# Altium PCB sar20-afbr-s50-array-board.PcbDoc (part 1 of 2)
Units mm, origin at the board's own origin, x right, y up, seen from the top; angles counter-clockwise.
Board outline 56.81 x 49.75 mm, 4 copper layers (Top Layer, L2, L3, Bottom Layer), stack 1.588 mm thick; 83 components, 66 nets, 442 pads, 280 vias.
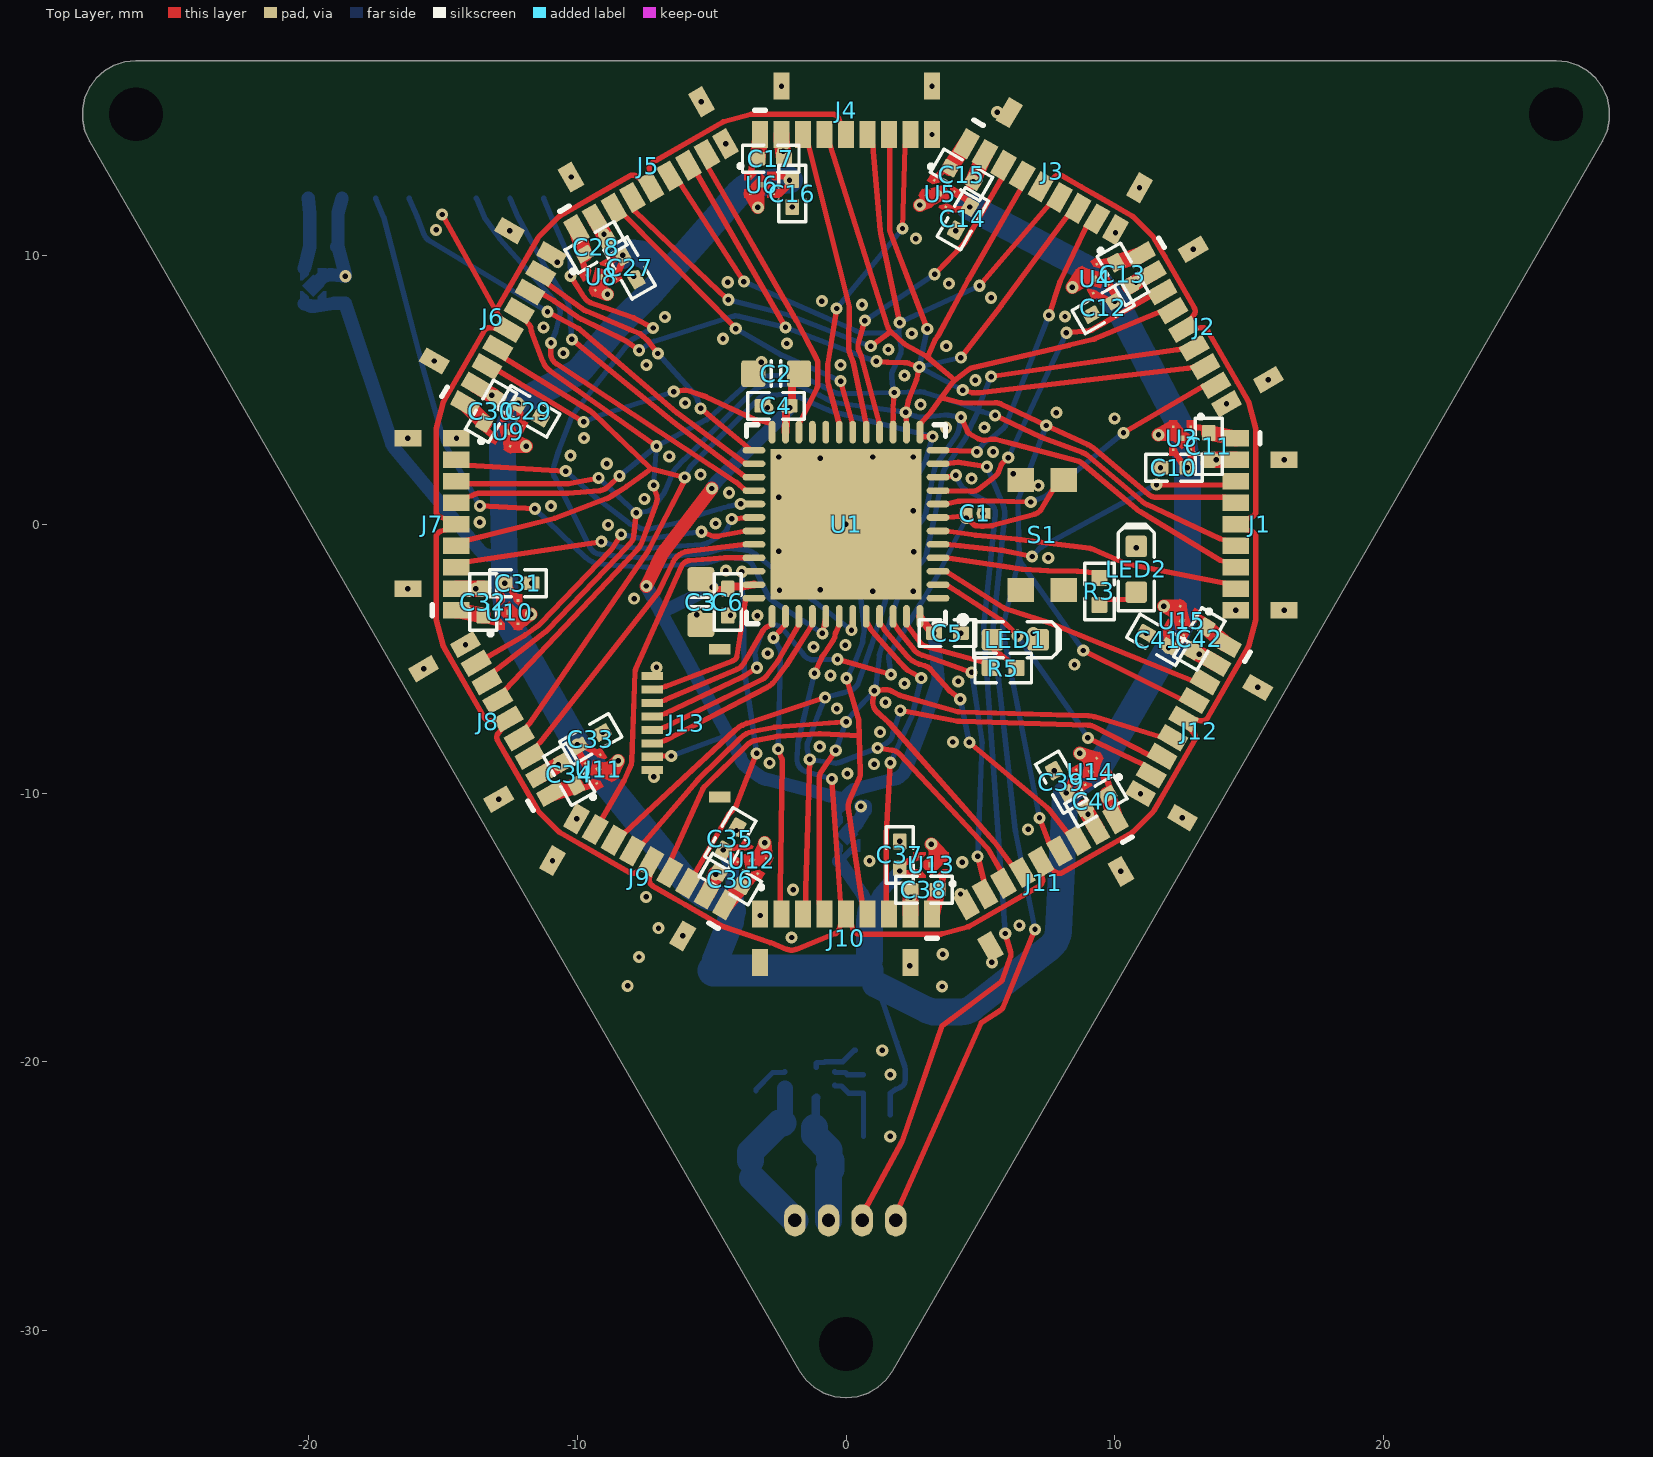
[diagram p0: Top Layer view]
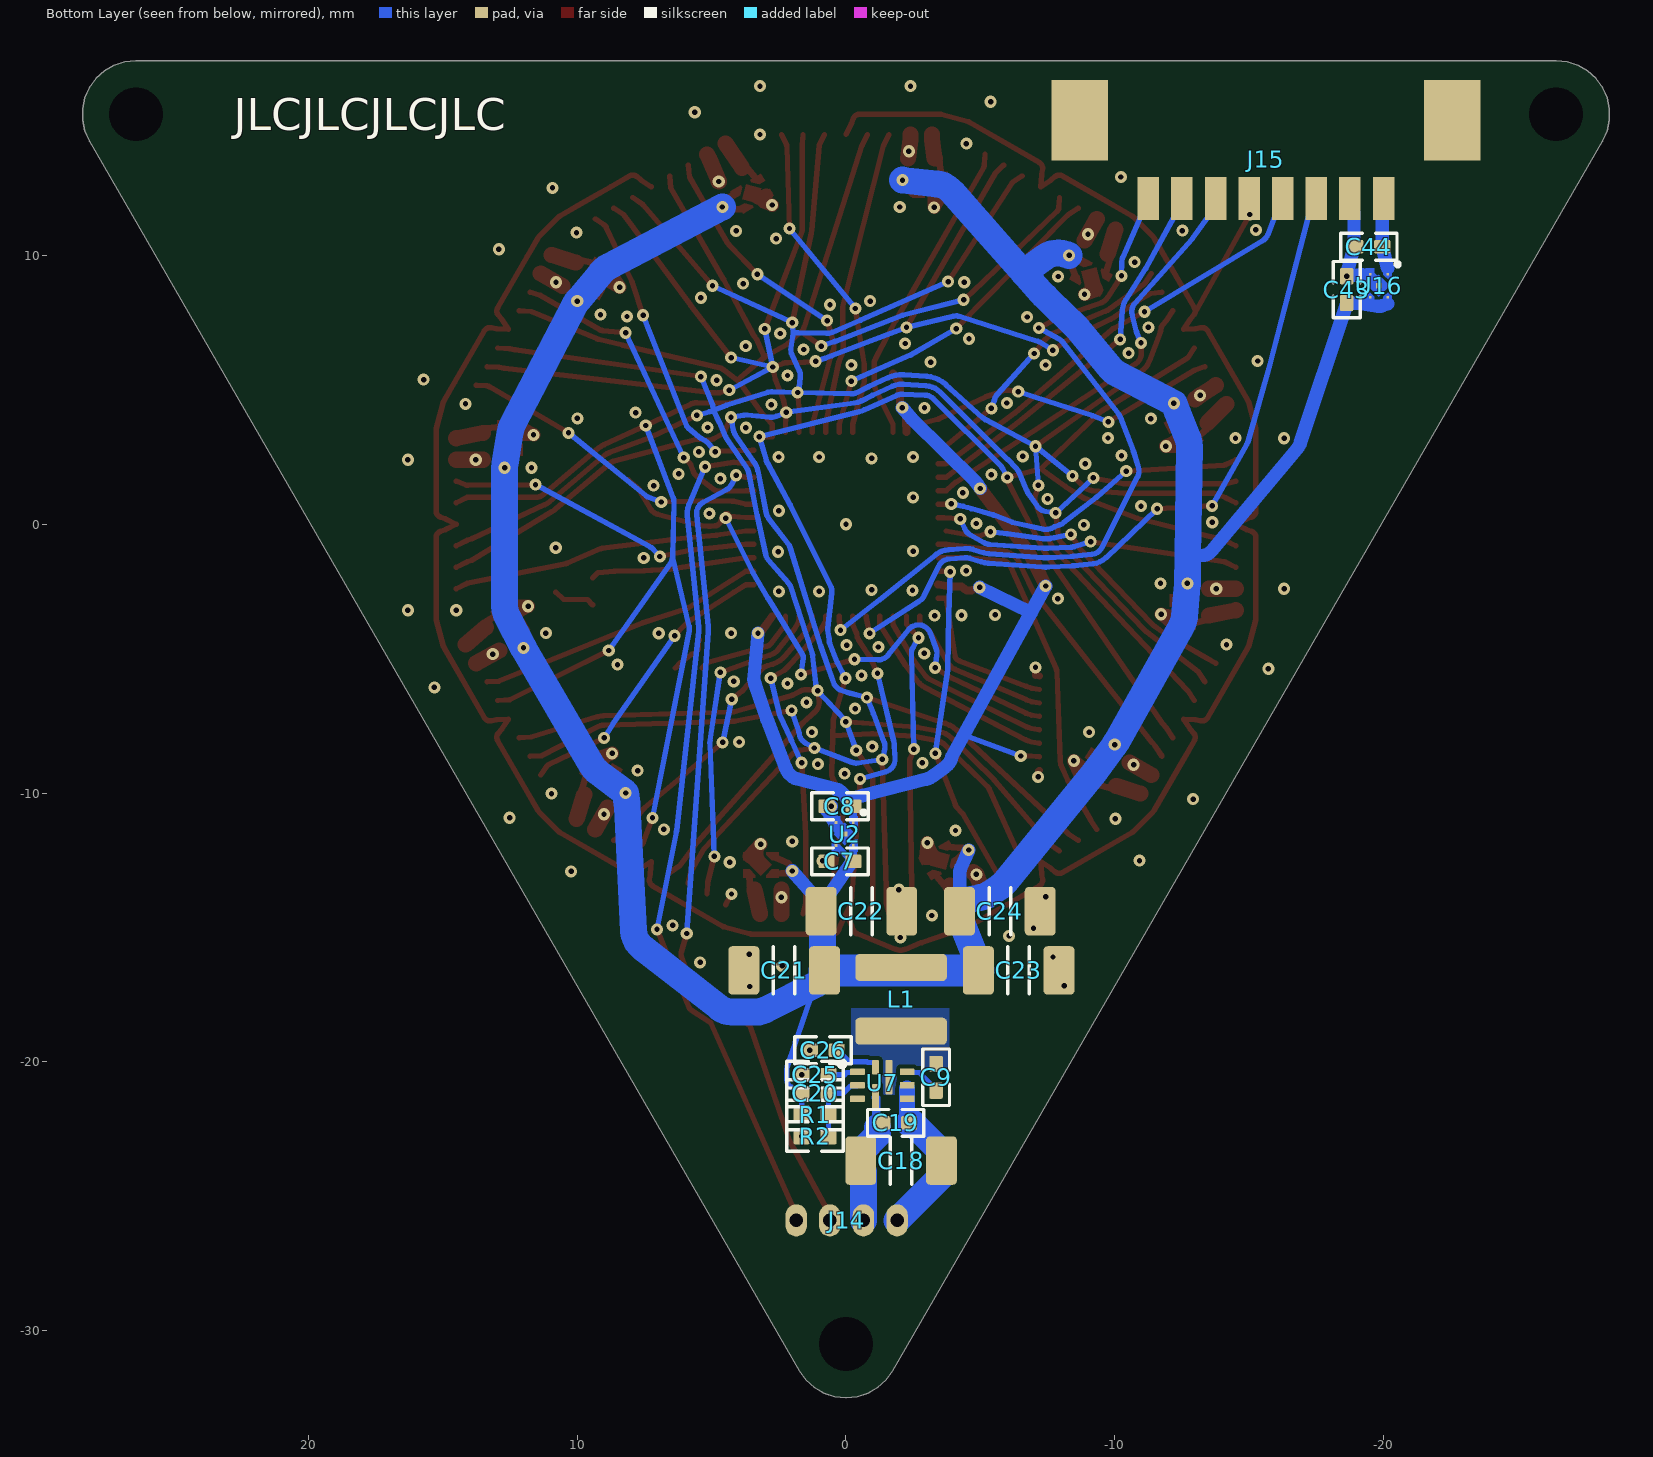
[diagram p1: Bottom Layer view, seen from below]
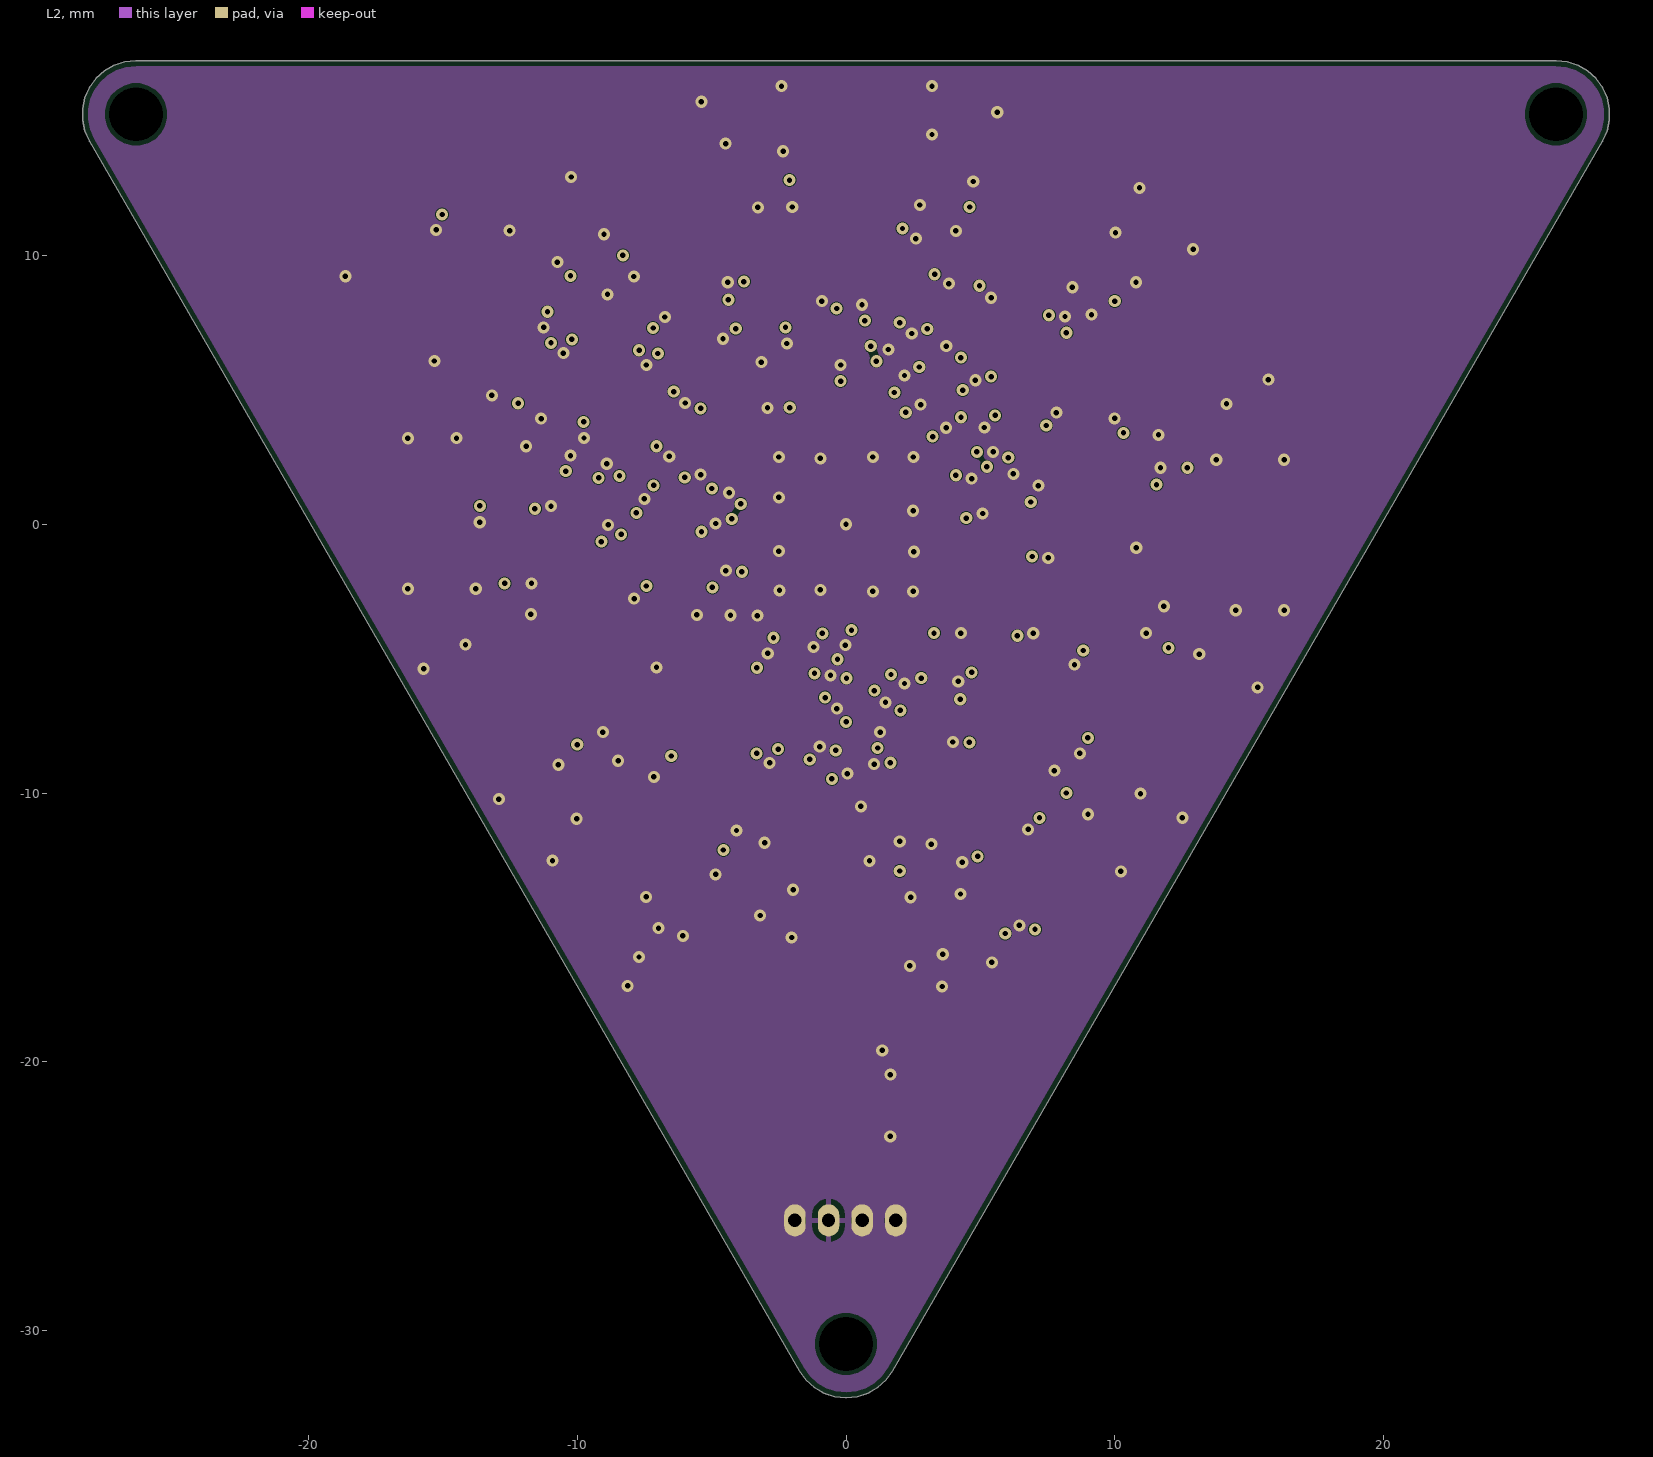
[diagram p2: L2]
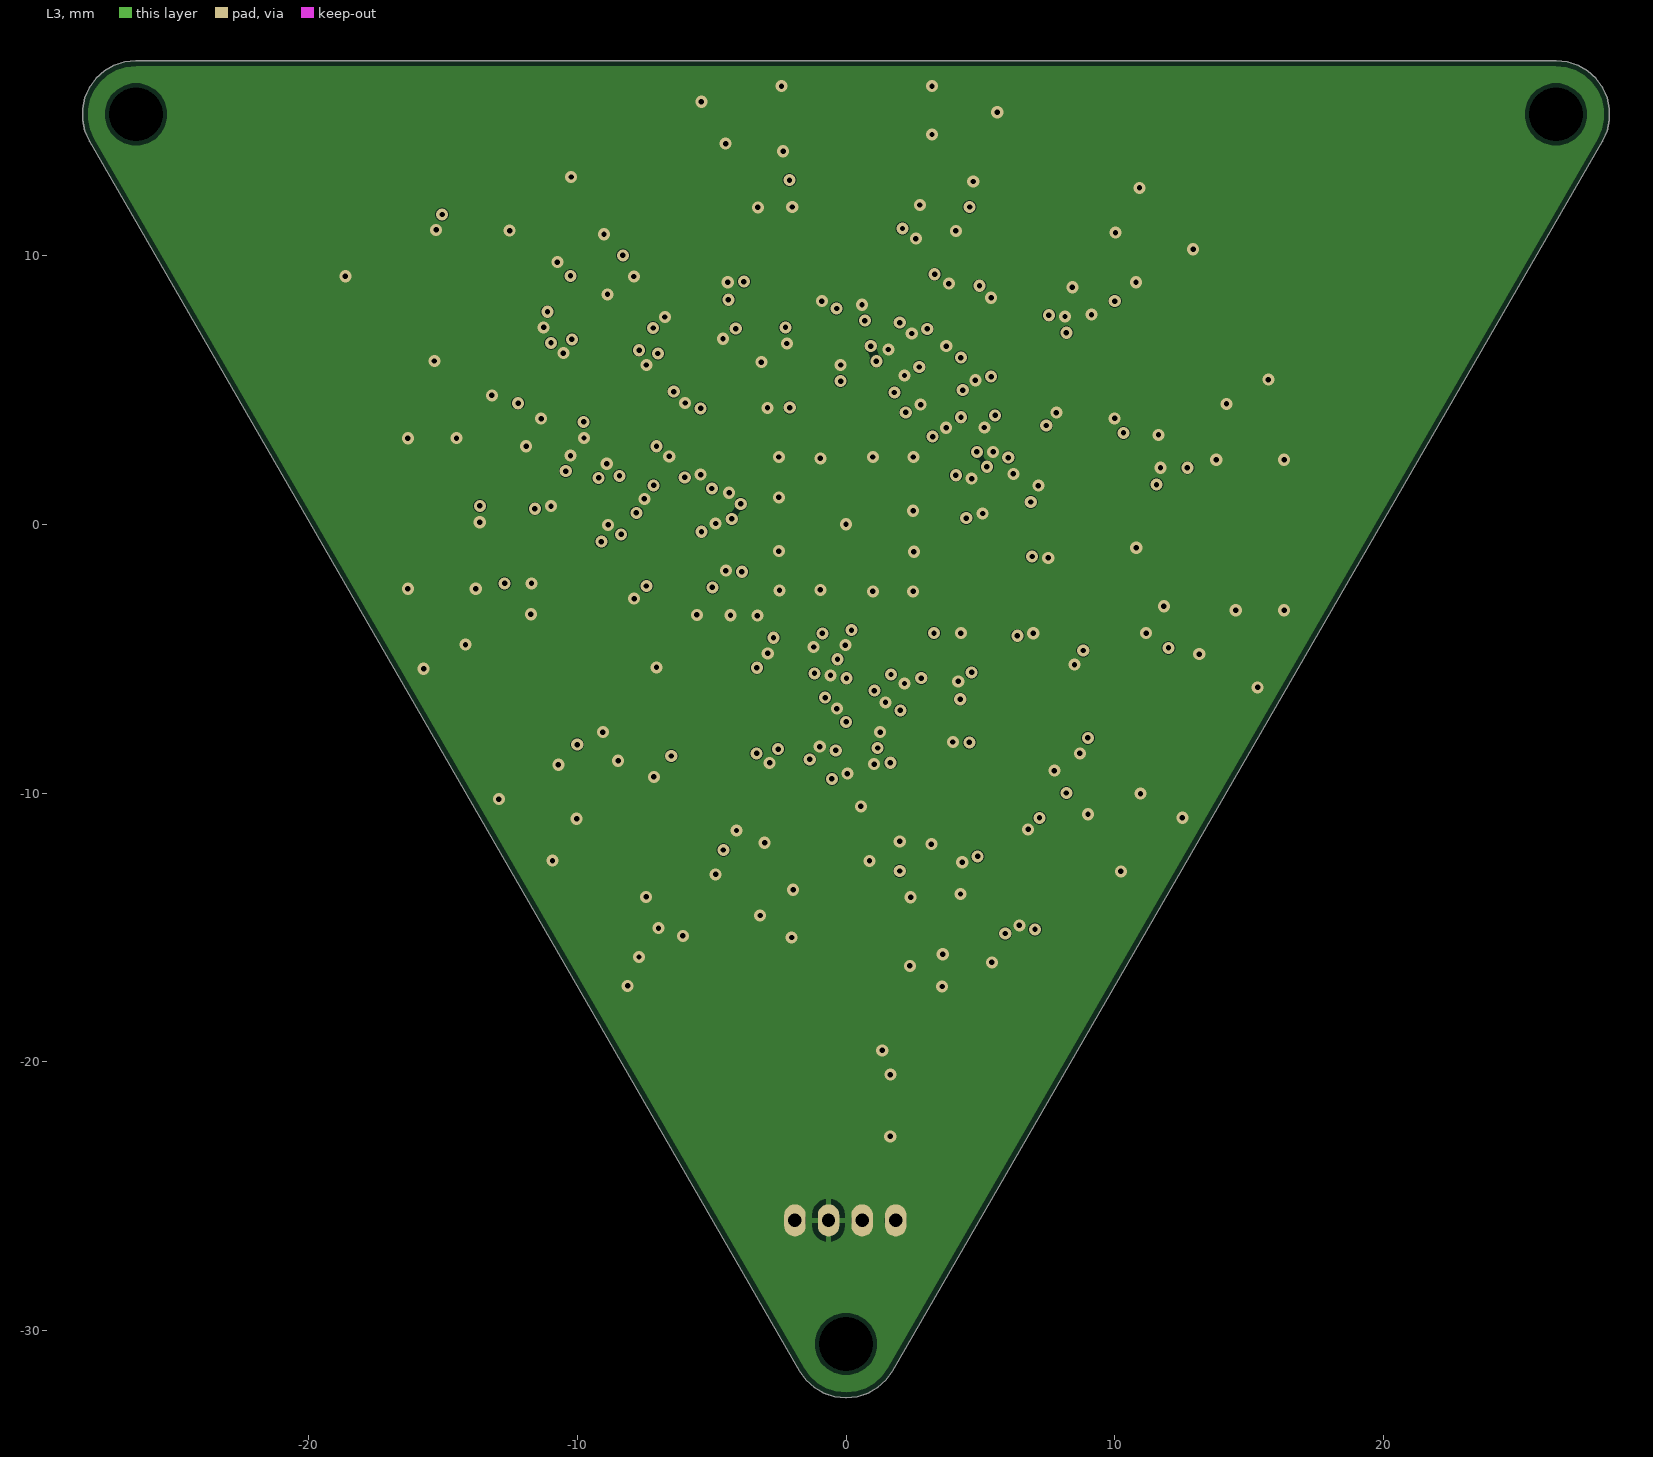
[diagram p3: L3]

## Layer stack, top to bottom
Top Solder: solder mask 0.0102, Solder Resist, Dk 3.5
Top Layer: signal copper 0.035
Dielectric 2: prepreg 0.2083, PP-022, Dk 4.5
L2: signal copper 0.018
Dielectric 1: core 1.065, Core-042, Dk 4.6
L3: signal copper 0.018
Dielectric 3: prepreg 0.2083, PP-022, Dk 4.5
Bottom Layer: signal copper 0.035
Bottom Solder: solder mask 0.0102, Solder Resist, Dk 3.5

## Board outline
-26.414,17.25 -26.83,17.206 -27.227,17.077 -27.589,16.868 -27.9,16.588 -28.146,16.25 -28.316,15.868 -28.403,15.459 -28.403,15.041 -28.316,14.632 -28.146,14.25 -1.732,-31.5 -1.486,-31.838 -1.176,-32.118 -0.813,-32.327 -0.416,-32.456 0,-32.5 0.416,-32.456 0.813,-32.327 1.176,-32.118 1.486,-31.838 1.732,-31.5 28.146,14.25 28.316,14.632 28.403,15.041 28.403,15.459 28.316,15.868 28.146,16.25 27.9,16.588 27.589,16.868 27.227,17.077 26.83,17.206 26.414,17.25

## Design rules (kind name [scope] priority, off if disabled: settings)
BoardOutlineClearance [All] p1: gap=0.2 ignorepadtopadclearanceinfootprint=FALSE except(0: Arc-SplitContinuation Track-SplitContinuation SMDPad-SplitContinuation THPad-SplitContinuation Via-SplitContinuation Fill-SplitContinuation Poly-SplitContinuation Region-SplitContinuation Text-SplitContinuation)
Clearance ClearanceComponentPads [HasFootprint('TI_X2SON_DQN0004A')] p1: gap=0.1 ignorepadtopadclearanceinfootprint=FALSE except(0: Arc-Hole Track-Hole SMDPad-Hole THPad-Hole Via-Hole Fill-Hole Poly-Hole Region-Hole Text-Hole)
Clearance [All] p2: gap=0.15 ignorepadtopadclearanceinfootprint=TRUE except(0: Arc-Hole Track-Hole SMDPad-Hole THPad-Hole Via-Hole Fill-Hole Poly-Hole Region-Hole Text-Hole)
ComponentClearance [All] p1: gap=0.1 collisioncheckmode=3 verticalgap=0.1 showdistances=FALSE
PolygonConnect PolygonConnectDirect [IsVia or InNet('NetC9_2')] p1: connectstyle=Direct reliefconductorwidth=0.2 reliefentries=4 polygonreliefangle="90 Angle" airgapwidth=0.2
PolygonConnect [All] p2: connectstyle=Relief reliefconductorwidth=0.2 reliefentries=4 polygonreliefangle="90 Angle" airgapwidth=0.2
RoomDefinition sar20-afbr-s50-array-board [InComponentClass('sar20-afbr-s50-array-board')] p1: confinementstyle=ConfineIn formatcopy=TRUE lockcomponents=FALSE outline -103.508,-80.857 111,-80.857 111,94 -103.508,94
RoutingVias [All] p1: holewidth=0.2 width=0.45 viastyle="Through Hole" minholewidth=0.2 minwidth=0.45 maxholewidth=3 maxwidth=5
SolderMaskExpansion SolderMaskExpansionVia [IsVia] p1: expansion=0.05 istentingtop=TRUE
SolderMaskExpansion [All] p2: expansion=0.05 istentingtop=FALSE
Width [All] p1: maxlimit=5 minlimit=0.2 preferedwidth=0.2
29 further rules are at their usual default settings.

## Components (designator, comment, footprint, x,y, rotation, side; value= is the part's Value field where it differs from the comment)
C1 "CAPC_100n_0201" CAPC0603X04N 4.8,0.4 r180 top value=100n
C2 "approved sub OK" CAPC1608X90N -2.6,5.6 r180 top value=4.7u
C3 "approved sub OK" CAPC1608X90N -5.4,-2.9 r270 top value=4.7u
C4 "100n" CAPC1005X55N -2.6,4.4 r0 top
C5 "100n" CAPC1005X55N 3.775,-4.05 r180 top
C6 "100n" CAPC1005X55N -4.4,-2.9 r90 top
C7 "1u" CAPC1005X55N 0.225,-12.545 r180 bottom
C8 "1u" CAPC1005X55N 0.225,-10.495 r180 bottom
C9 "100n" CAPC1005X55N -3.35,-20.575 r90 bottom
C10 "1u" CAPC1005X55N 12.2,2.1 r0 top
C11 "1u" CAPC1005X55N 13.5,2.9 r90 top
C12 "1u" CAPC1005X55N 9.567,8.05 r30 top
C13 "1u" CAPC1005X55N 10.3,9.3 r120 top
C14 "1u" CAPC1005X55N 4.35,11.367 r60 top
C15 "1u" CAPC1005X55N 4.3,13 r150 top
C16 "1u" CAPC1005X55N -2,12.3 r90 top
C17 "1u" CAPC1005X55N -2.8,13.6 r180 top
C18 "approved sub OK" CAPC3216X180N -2.05,-23.675 r0 bottom value=47u
C19 "100n" CAPC1005X55N -1.85,-22.275 r180 bottom
C20 "33p" CAPC1005X55N 1.15,-21.175 r0 bottom
C21 "approved sub OK" CAPC3216X180N 2.3,-16.6 r0 bottom value=47u
C22 "approved sub OK" CAPC3216X180N -0.575,-14.4 r180 bottom value=47u
C23 "approved sub OK" CAPC3216X180N -6.425,-16.6 r180 bottom value=47u
C24 "approved sub OK" CAPC3216X180N -5.725,-14.4 r180 bottom value=47u
C25 "1u" CAPC1005X55N 1.15,-20.475 r180 bottom
C26 "10n" CAPC1005X55N 0.85,-19.575 r180 bottom
C27 "1u" CAPC1005X55N -8.05,9.533 r120 top
C28 "1u" CAPC1005X55N -9.3,10.3 r210 top
C29 "1u" CAPC1005X55N -11.8,4.2 r150 top
C30 "1u" CAPC1005X55N -13.2,4.2 r240 top
C31 "1u" CAPC1005X55N -12.2,-2.2 r180 top
C32 "1u" CAPC1005X55N -13.5,-2.9 r270 top
C33 "1u" CAPC1005X55N -9.5,-8 r210 top
C34 "1u" CAPC1005X55N -10.3,-9.3 r300 top
C35 "1u" CAPC1005X55N -4.3,-11.7 r240 top
C36 "1u" CAPC1005X55N -4.3,-13.2 r330 top
C37 "1u" CAPC1005X55N 2,-12.3 r270 top
C38 "1u" CAPC1005X55N 2.9,-13.6 r0 top
C39 "1u" CAPC1005X55N 8,-9.6 r300 top
C40 "1u" CAPC1005X55N 9.3,-10.3 r30 top
C41 "1u" CAPC1005X55N 11.6,-4.3 r330 top
C42 "1u" CAPC1005X55N 13.15,-4.267 r60 top
C43 "1u" CAPC1005X55N -18.625,8.725 r270 bottom
C44 "1u" CAPC1005X55N -19.45,10.325 r180 bottom
J1 "AFBR-S50_PADS" AFBR-S50_PADS 15,0 r270 top locked
J2 "AFBR-S50_PADS" AFBR-S50_PADS 12.99,7.5 r300 top locked
J3 "AFBR-S50_PADS" AFBR-S50_PADS 7.5,12.99 r330 top locked
J4 "AFBR-S50_PADS" AFBR-S50_PADS 0,15 r0 top locked
J5 "AFBR-S50_PADS" AFBR-S50_PADS -7.5,12.99 r30 top locked
J6 "AFBR-S50_PADS" AFBR-S50_PADS -12.99,7.5 r60 top locked
J7 "AFBR-S50_PADS" AFBR-S50_PADS -15,0 r90 top locked
J8 "AFBR-S50_PADS" AFBR-S50_PADS -12.99,-7.5 r120 top locked
J9 "AFBR-S50_PADS" AFBR-S50_PADS -7.5,-12.99 r150 top locked
J10 "AFBR-S50_PADS" AFBR-S50_PADS 0,-15 r180 top locked
J11 "AFBR-S50_PADS" AFBR-S50_PADS 7.5,-12.99 r210 top locked
J12 "AFBR-S50_PADS" AFBR-S50_PADS 12.99,-7.5 r240 top locked
J13 "FPC" HIROSE-FH19C-8S-0.5SH -4.7,-7.4 r90 top
J14 "MOLEX_PICOBLADE_530470410" MOLEX_PICOBLADE_530470410 -1.9,-25.9 r0 bottom
J15 "MOLEX_PICOBLADE_532610871" MOLEX_PICOBLADE_532610871 -15.625,12.125 r0 bottom
L1 "XGL4030-332" XGL4030 -2.05,-17.675 r90 bottom
LED1 "White" LED-0603-WHITE 6.3,-4.3 r0 top
LED2 "White" LED-0603-WHITE 10.8,-1.675 r90 top
R1 "Thick Film" RESC1005X40N 1.15,-21.975 r0 bottom value=232k
R2 "Thick Film" RESC1005X40N 1.15,-22.775 r180 bottom value=30k
R3 "Thick Film" RESC1005X40N 9.425,-2.5 r270 top value=1k
R5 "Thick Film" RESC1005X40N 5.85,-5.35 r0 top value=1k
S1 "PUSHBUTTON" KMR421NGLFS 7.3,-0.4 r90 top
U1 "STM32G491CxU" QFN50P700X700X60_HS-49N 0,0 r180 top locked
U2 "TPS7A20_DQN" TI_X2SON_DQN0004A 0.05,-11.525 r270 bottom
U3 "TPS7A20_DQN" TI_X2SON_DQN0004A 12.5,3.2 r270 top
U4 "TPS7A20_DQN" TI_X2SON_DQN0004A 9.266,9.135 r300 top
U5 "TPS7A20_DQN" TI_X2SON_DQN0004A 3.5,12.3 r330 top
U6 "TPS7A20_DQN" TI_X2SON_DQN0004A -3.13,12.625 r0 top
U7 "TPS566238" TI_VQFN-HR_RQF0009A -1.35,-20.875 r180 bottom
U8 "TPS7A20_DQN" TI_X2SON_DQN0004A -9.11,9.204 r30 top
U9 "TPS7A20_DQN" TI_X2SON_DQN0004A -12.566,3.435 r60 top
U10 "TPS7A20_DQN" TI_X2SON_DQN0004A -12.525,-3.27 r90 top
U11 "TPS7A20_DQN" TI_X2SON_DQN0004A -9.204,-9.11 r120 top
U12 "TPS7A20_DQN" TI_X2SON_DQN0004A -3.5,-12.5 r150 top
U13 "TPS7A20_DQN" TI_X2SON_DQN0004A 3.17,-12.675 r180 top
U14 "TPS7A20_DQN" TI_X2SON_DQN0004A 9.11,-9.204 r210 top
U15 "TPS7A20_DQN" TI_X2SON_DQN0004A 12.496,-3.59 r240 top
U16 "TPS7A20_DQN" TI_X2SON_DQN0004A -19.825,8.87 r270 bottom

## Footprints (in the part's own frame and the unit in brackets; to place one, negate y for a bottom-side part, rotate by r counter-clockwise, add the part's x,y. Pads: shape width x height; smd on the part's side, far side on the other; paste and mask are expansions set on the pad)
AFBR-S50_PADS [mm]
  rect 0.6x1 smd: 1(-3.2,-0.5) 2(-2.4,-0.5) 3(-1.6,-0.5) 4(-0.8,-0.5) 5(0,-0.5) 6(0.8,-0.5) 7(1.6,-0.5) 8(2.4,-0.5) 9(3.2,-0.5) 10(-2.4,1.3) 11(3.2,1.3)
  silkscreen extent -3.4,0.4 -3,0.4, body extent -3.85,0 3.85,8.7, height 12
CAPC0603X04N [mm] "Chip Capacitor, 2-Leads, Body 0,60x0,30mm, IPC Medium Density"
  rect 0.48x0.42 smd: 1(-0.33,0) 2(0.33,0)
  body extent -0.33,-0.18 0.33,0.18, height 0.35
CAPC1005X55N [mm] "Chip Capacitor, Body 1.0x0.5mm, EIA 0402, IPC Medium Density"
  round 0.2 on Mech15: 0(0,0)
  rrect20% 0.6x0.5 smd: 1(-0.5,0) 2(0.5,0)
  Top Layer pour cut-out: -0.325,0.375 -0.2,0.5 0.2,0.5 0.325,0.375 0.325,-0.375 0.2,-0.5 -0.2,-0.5 -0.325,-0.375
  silkscreen extent -1.05,-0.5 1.05,0.5, body extent -0.52,-0.27 0.53,0.28, height 0.55
CAPC1608X90N [mm] "Chip Capacitor, Body 1.6x0.8mm, EIA 0603, IPC Medium Density"
  round 0.254 on Mech15: 0(0,0)
  rrect25% 0.9x1 smd: 1(-0.85,0) 2(0.85,0)
  Top Layer pour cut-out: -0.6,0.5 -0.4,0.7 0.4,0.7 0.6,0.5 0.6,-0.5 0.4,-0.7 -0.4,-0.7 -0.6,-0.5
  silkscreen extent -0.18,-0.48 0.18,0.48, body extent -0.85,-0.45 0.85,0.45, height 0.89
CAPC3216X180N [mm] "Chip Capacitor, Body 3.2x1.6mm, 1.8mm H, EIA 1206, IPC Medium Density"
  round 0.508 on Mech15: 0(0,0)
  rrect25% 1.15x1.8 smd: 1(-1.5,0) 2(1.5,0)
  silkscreen extent -0.4,-0.88 0.4,0.88, body extent -1.7,-0.9 1.7,0.9, height 1.8
HIROSE-FH19C-8S-0.5SH [mm]
  rect 0.3x0.8 smd paste+0 mask+0.102: 1(-1.75,2.5) 2(-1.25,2.5) 3(-0.75,2.5) 4(-0.25,2.5) 5(0.25,2.5) 6(0.75,2.5) 7(1.25,2.5) 8(1.75,2.5)
  rect 0.4x0.8 smd paste+0 mask+0.102: SH(-2.75,0) SH(2.75,0)
  body extent -3,-0.8 3,2.7, height 0.9
KMR421NGLFS [mm]
  rect 0.9x1 smd: 1(-2.05,0.8) 1(2.05,0.8) 2(-2.05,-0.8) 2(2.05,-0.8)
  body extent -2.3,-1.4 2.3,1.4, height 2.52
LED-0603-WHITE [mm]
  round 0.254 on Mech15: 0(0,0)
  rrect25% 0.8x0.8 smd: A(-0.85,0) K(0.85,0)
  Top Layer pour cut-out: -0.5,0.5 0.5,0.5 0.5,-0.5 -0.5,-0.5
  silkscreen extent -1.55,-0.67 1.68,0.67, body extent -0.8,-0.4 0.8,0.4, height 0.75
MOLEX_PICOBLADE_530470410 [mm]
  oval 0.8x1.2 hole 0.5: 1(0,0) 2(1.25,0) 3(2.5,0) 4(3.75,0)
  body extent -1.5,-1.15 5.25,2.05, height 4.21
MOLEX_PICOBLADE_532610871 [mm]
  rect 0.8x1.6 smd: 1(-4.375,0) 2(-3.125,0) 3(-1.875,0) 4(-0.625,0) 5(0.625,0) 6(1.875,0) 7(3.125,0) 8(4.375,0)
  rect 2.1x3 smd: M1(-6.925,-2.9) M2(6.925,-2.9)
  body extent -7.57,-4.98 7.58,0.22, height 3.41
QFN50P700X700X60_HS-49N [mm] "QFN, 48-Leads, Body 7,00x7,00mm, Pitch 0,50mm, Thermal Pad 5,60x5,60mm, IPC Medium Density"
  oval 0.85x0.25 smd: 1(-3.425,2.75) 2(-3.425,2.25) 3(-3.425,1.75) 4(-3.425,1.25) 5(-3.425,0.75) 6(-3.425,0.25) 7(-3.425,-0.25) 8(-3.425,-0.75) 9(-3.425,-1.25) 10(-3.425,-1.75) 11(-3.425,-2.25) 12(-3.425,-2.75) 25(3.425,-2.75) 26(3.425,-2.25) 27(3.425,-1.75) 28(3.425,-1.25) 29(3.425,-0.75) 30(3.425,-0.25) 31(3.425,0.25) 32(3.425,0.75) 33(3.425,1.25) 34(3.425,1.75) 35(3.425,2.25) 36(3.425,2.75)
  oval 0.25x0.85 smd: 13(-2.75,-3.425) 14(-2.25,-3.425) 15(-1.75,-3.425) 16(-1.25,-3.425) 17(-0.75,-3.425) 18(-0.25,-3.425) 19(0.25,-3.425) 20(0.75,-3.425) 21(1.25,-3.425) 22(1.75,-3.425) 23(2.25,-3.425) 24(2.75,-3.425) 37(2.75,3.425) 38(2.25,3.425) 39(1.75,3.425) 40(1.25,3.425) 41(0.75,3.425) 42(0.25,3.425) 43(-0.25,3.425) 44(-0.75,3.425) 45(-1.25,3.425) 46(-1.75,3.425) 47(-2.25,3.425) 48(-2.75,3.425)
  rect 5.6x5.6 smd: 49(0,0)
  silkscreen extent -4.47,-3.7 3.7,3.7, body extent -3.55,-3.55 3.55,3.55, height 0.6
RESC1005X40N [mm] "Chip Resistor, Body 1.0x0.5mm, EIA 0402, IPC Medium Density"
  round 0.2 on Mech15: 0(0,0)
  rrect20% 0.6x0.6 smd: 1(-0.5,0) 2(0.5,0)
  Top Layer pour cut-out: -0.325,0.375 -0.2,0.5 0.2,0.5 0.325,0.375 0.325,-0.375 0.2,-0.5 -0.2,-0.5 -0.325,-0.375
  silkscreen extent -1.05,-0.55 1.05,0.55, body extent -0.52,-0.27 0.53,0.28, height 0.4
TI_VQFN-HR_RQF0009A [mm]
  rrect30% 0.55x0.25 smd: 1(-0.925,0.5) 2(-0.925,0) 3(-0.925,-0.5) 5(0.925,-0.5) 6(0.925,0) 7(0.925,0.5)
  rrect30% 0.25x1 smd: 4(-0.25,-0.45)
  rrect30% 0.25x1.3 smd: 8(0.25,0.3)
  rrect30% 0.25x0.55 smd: 9(-0.25,0.675)
  silkscreen extent -1.6,0.7 -1.4,0.9, body extent -1,-0.75 1,0.75, height 1
TI_X2SON_DQN0004A [mm]
  rect 0.1x0.1 smd paste+0 mask+0: 1(-0.43,0.325) 2(-0.43,-0.325) 3(0.43,-0.325) 4(0.43,0.325)
  rect 0.2x0.2 smd paste+0 mask+0: 5(0,0)
  Top Layer region: 0,0.41 -0.41,0 0,-0.41 0.41,0
  Top Layer region: 0.66,0.48 0.2,0.48 0.2,0.38 0.41,0.17 0.66,0.17
  Top Layer region: -0.66,-0.48 -0.2,-0.48 -0.2,-0.38 -0.41,-0.17 -0.66,-0.17
  Top Layer region: 0.66,-0.48 0.2,-0.48 0.2,-0.38 0.41,-0.17 0.66,-0.17
  Top Layer region: -0.66,0.48 -0.2,0.48 -0.2,0.38 -0.41,0.17 -0.66,0.17
  silkscreen extent -0.85,0.65 -0.75,0.75, body extent -0.5,-0.5 0.5,0.5, height 0.34
XGL4030 [mm]
  rrect30% 1x3.4 smd: 1(-1.185,0) 2(1.185,0)
  body extent -2.15,-2.15 2.15,2.15, height 3.1

## Part data
C2 C3: library part CAPC_2u2_0603_10V_10%, "Capacitor SMD Cer 2.2uF 10% 10V X5R 0603", Manufacturer 1="AVX Corporation", Manufacturer Part Number 1=0603ZD225KAT2A, Package / Case="0603 (1608 metric)", Ratings="10V; X5R", Supplier Part Number 1=478-6212-1-ND, Tolerance=±10%, ComponentLink1Description=http://www.avx.com/docs/Catalogs/cx5r.pdf, ComponentLink1URL=http://www.avx.com/docs/Catalogs/cx5r.pdf, Material=ceramic, SCDType=spec, Supplier 1=Digi-Key
C4 C5 C6 C7 C8 C9 C10 C11 C12 C13 C14 C15 C16 C17 C19 C20 C25 C26 C27 C28 C29 C30 C31 C32 C33 C34 C35 C36 C37 C38 C39 C40 C41 C42 C43 C44: library part CAPC_100n_0402_X5R_16V_10%, "Capacitor SMD Cer 100nF 10% 16V X5R 0402", Manufacturer 1="AVX Corporation", Manufacturer 2=Yageo, Manufacturer Part Number 1=0402YD104KAT2A, Manufacturer Part Number 2=CC0402KRX5R7BB104, Operating Temperature="-55°C ~ 125°C", Package / Case="0402 (1005 Metric)", Ratings="16V; X5R", Supplier Part Number 1=478-1126-1-ND, Tolerance=±10%, ComponentLink1Description=http://www.avx.com/docs/Catalogs/cx5r.pdf, ComponentLink1URL=http://www.avx.com/docs/Catalogs/cx5r.pdf, ComponentLink2Description=http://www.yageo.com/documents/recent/UPY-GPHC_X5R_4V-to-50V_12.pdf, ComponentLink2URL=http://www.yageo.com/documents/recent/UPY-GPHC_X5R_4V-to-50V_12.pdf, SCDType=spec, Size / Dimension="0.039\" L x 0.020\" W (1.00mm x 0.50mm)", Supplier 1=Digi-Key, Supplier 2=Digi-Key, Supplier Part Number 2=311-1347-1-ND
C18 C21 C22 C23 C24: library part CAPC_10u_1206_16V, "Capacitor SMD Cer 10uF 10% 16V X7R 1206", Manufacturer 1=Kemet, Manufacturer Part Number 1=C1206C106K4RACTU, Package / Case="1206 (3216 metric)", Ratings="16V; X7R", Supplier Part Number 1=399-3525-1-ND, Tolerance=±10%, Material=ceramic, SCDType=spec, Supplier 1=Digi-Key
J13: library part FPC-CONNECTOR-8
L1: library part XGL4030
LED1 LED2: library part LED_SMD_White_0603_Bright, "LED 0603 SMD Bright White 8700K", Luminous Flux @ Current - Test=-, Manufacturer 1="Lite-On Inc", Manufacturer 2="Kingbright Corp", Manufacturer Part Number 1=LTW-C193TS5, Manufacturer Part Number 2=APT1608QWF/D, Millicandela Rating=230mcd, Package / Case="0603 (1608 metric)", Ratings="Ultra Bright; 8700K", Supplier Part Number 1=160-1721-1-ND, Voltage - Forward (Vf) @ 10mA=3.0V, Voltage - Forward (Vf) Typ=3.3V, Color=White, ComponentLink1Description=http://media.digikey.com/pdf/Data%20Sheets/Lite-On%20PDFs/LTW-C193TS5.pdf, ComponentLink1URL=http://media.digikey.com/pdf/Data%20Sheets/Lite-On%20PDFs/LTW-C193TS5.pdf, ComponentLink2Description=http://www.kingbrightusa.com/images/catalog/SPEC/APT1608QWF-D.pdf, ComponentLink2URL=http://www.kingbrightusa.com/images/catalog/SPEC/APT1608QWF-D.pdf, Lens Style/Size="Rectangle with Flat Top, 0.8mm x 1.1mm", Lens Type="Clear, Tinted", Material=InGaN, Mounting Type="Surface Mount", SCDType=source, Size / Dimension="1.60mm L x 0.80mm W", Supplier 1=Digi-Key, Supplier 2=Digi-Key, Supplier Part Number 2=APT1608QWF/D-ND, Viewing Angle=120°
R1 R2: library part RES_10K_0402_1%, "Resistor SMD chip 10k Ohm 0.063W 1% 0402", Manufacturer 1="Vishay Dale", Manufacturer 2=Yageo, Manufacturer Part Number 1=CRCW040210K0FKED, Manufacturer Part Number 2=RC0402FR-0710KL, Package / Case="0402 (1005 Metric)", Ratings="1/16 W", Supplier Part Number 1=541-10.0KLCT-ND, Tolerance=±1%, ComponentLink1Description=http://www.vishay.com/doc?20035, ComponentLink1URL=http://www.vishay.com/doc?20035, ComponentLink2Description=http://www.yageo.com/documents/recent/PYu-RC0402_51_RoHS_L_6.pdf, ComponentLink2URL=http://www.yageo.com/documents/recent/PYu-RC0402_51_RoHS_L_6.pdf, SCDType=spec, Supplier 1=Digi-Key, Supplier 2=Digi-Key, Supplier Part Number 2=311-10.0KLRCT-ND
R3 R5: library part RES_1K_0402_5%, "Resistor SMD chip 1k Ohm 0.063W 5% 0402", Manufacturer 1=Yageo, Manufacturer 2="Vishay Dale", Manufacturer 3="Samsung Electro-Mechanics America, Inc", Manufacturer 4="Rohm Semiconductor", Manufacturer 5="Panasonic Electronic Components", Manufacturer Part Number 1=RC0402JR-071KL, Manufacturer Part Number 2=CRCW04021K00JNED, Manufacturer Part Number 3=RC1005J102CS, Manufacturer Part Number 4=MCR01MRTJ102, Manufacturer Part Number 5=ERJ-2GEJ102X, Package / Case="0402 (1005 Metric)", Ratings="1/16 W", Supplier Part Number 1=311-1.0KJRCT-ND, Tolerance=±5%, ComponentLink1Description=http://www.yageo.com/documents/recent/PYu-RC0402_51_RoHS_L_6.pdf, ComponentLink1URL=http://www.yageo.com/documents/recent/PYu-RC0402_51_RoHS_L_6.pdf, ComponentLink2Description=http://www.vishay.com/doc?20035, ComponentLink2URL=http://www.vishay.com/doc?20035, ComponentLink3Description=http://www.samsungsem.com/servlet/FileDownload?filename=productcatalog/pdf/Chip_Resistor.pdf, ComponentLink3URL=http://www.samsungsem.com/servlet/FileDownload?filename=productcatalog/pdf/Chip_Resistor.pdf, ComponentLink4Description=http://rohmfs.rohm.com/en/products/databook/datasheet/passive/resistor/chip_resistor/mcr_g.pdf, ComponentLink4URL=http://rohmfs.rohm.com/en/products/databook/datasheet/passive/resistor/chip_resistor/mcr_g.pdf, ComponentLink5Description=http://industrial.panasonic.com/www-cgi/jvcr13pz.cgi?E+PZ+3+AOA0001+ERJ2GEJ102X+7+WW, ComponentLink5URL=http://industrial.panasonic.com/www-cgi/jvcr13pz.cgi?E+PZ+3+AOA0001+ERJ2GEJ102X+7+WW, RoHS 1="RoHS Compliant", RoHS 2="RoHS Compliant", RoHS 3="RoHS Compliant", RoHS 4="RoHS Compliant", RoHS 5="RoHS Compliant", SCDType=spec, Supplier 1=Digi-Key, Supplier 2=Digi-Key, Supplier 3=Digi-Key, Supplier 4=Digi-Key, Supplier 5=Digi-Key, Supplier Part Number 2=541-1.0KJCT-ND, Supplier Part Number 3=1276-4376-1-ND, Supplier Part Number 4=RHM1.0KCECT-ND, Supplier Part Number 5=P1.0KJCT-ND

## Free pads (board coordinates)
  round 0 hole 2 unplated: hole(-26.414,15.25) hole(0,-30.5) hole(26.414,15.25)

## Via types
v1: diameter 0.45, hole 0.2, Top Layer to Bottom Layer, tented both sides, 280 vias

## Nets (pads, with @x,y where several pads share a name; then routed paths per layer and width w, separated by ;. In a path a pad name is that pad's centre, name@x,y a point inside that pad or via, vN(x,y) a via of type N, cw(c..) or ccw(c..) an arc to the next point about the centre after c; other vN are vias at no path point)
+3.3: C2.1 C3.1 C4.2 C5.2 C6.2 C8.2 J13.2 U1.23 U1.35 U1.48 U2.1 | length 38.7
  Top Layer w0.2: J13.2@-7.2,-8.65 -6.9,-8.625 v1(-6.5,-8.625)
  Top Layer w0.3: -4.697,-2.451 ccw(c-4.592,-2.17) -4.592,-2.47 -4.5,-2.47 C6.2@-4.4,-2.4 -4.3,-2.317 -3.925,-2.317 ccw(c-3.925,-1.792) -3.85,-2.311 U1.35@-3.425,-2.25 ; U1.23@-2.25,3.425 -2.25,3.648 -2.225,3.673 -2.225,4.3 C4.2@-2.092,4.388 ; C4.2@-2.1,4.4 -2.007,4.493 -2.007,5.25 C2.1@-1.75,5.6 ; v1(-2.093,4.338) -2.074,4.3 C4.2@-2.074,4.361 ; U1.48@2.75,-3.425 3.125,-3.95 v1(3.275,-4.05)
  Top Layer w0.5: v1(-7.428,-2.3) -6.875,-1.176 cw(c-5.788,-1.712) -6.742,-0.964 ccw(c-7.136,-0.657) -6.738,-0.96 v1(-4.989,1.331)
  Bottom Layer w0.2: v1(-6.5,-8.625) -4.383,-7.841
  Bottom Layer w0.25: U2.1@-0.275,-11.095 C8.2@-0.275,-10.62
  Bottom Layer w0.5: v1(-7.428,-2.3) -6.886,-3.286 ; v1(-4.989,1.331) -4.879,1.505 cw(c-4.35,1.172) -4.788,1.617 -2.482,3.882 ccw(c-2.92,4.328) -2.444,3.924 v1(-2.093,4.338) ; v1(-4.97,-2.35) -6.886,-3.286 ; C8.2@-0.275,-10.495 -0.225,-10.495 -0.076,-10.336 cw(c0.554,-10.495) 0.109,-10.021 0.158,-9.975 0.167,-9.967 cw(c0.475,-10.295) 0.361,-9.86 0.373,-9.857 0.375,-9.856 1.809,-9.48 ccw(c1.65,-8.875) 2.246,-9.064 2.246,-9.062 cw(c2.722,-9.215) 2.253,-9.043 cw(c2.722,-9.215) 2.256,-9.035 2.935,-7.276 ccw(c2.025,-6.925) 2.949,-7.237 3.384,-5.949 cw(c3.857,-6.109) 3.388,-5.938 ccw(c2.8,-5.725) 3.422,-5.668 v1(3.275,-4.05) ; C8.2@-0.05,-10.255 -0.256,-10.196 -0.418,-10.149 -0.579,-10.103 ccw(c-0.717,-10.584) -0.628,-10.091 -0.635,-10.09 cw(c-0.525,-9.475) -0.682,-10.08 -2.996,-9.483 cw(c-2.84,-8.878) -3.208,-9.383 -3.694,-9.03 cw(c-3.325,-8.525) -3.937,-8.654 -4.383,-7.841 -6.886,-3.286
+5.2: C7.2 C10.2 C12.2 C14.2 C16.2 C20.2 C21.1 C22.1 C23.1 C24.1 C27.2 C29.2 C31.2 C33.2 C35.2 C37.2 C39.2 C41.2 C43.2 L1.2 R1.2 U2.3 U2.4 U3.3 U3.4 U4.3 U4.4 U5.3 U5.4 U6.3 U6.4 U8.3 U8.4 U9.3 U9.4 U10.3 U10.4 U11.3 U11.4 U12.3 U12.4 U13.3 U13.4 U14.3 U14.4 U15.3 U15.4 U16.3 U16.4 | length 131.9
  Top Layer w0.25: U10.4@-12.85,-2.84 -12.85,-2.325 v1(-12.7,-2.2) -12.525,-2.325 U10.3@-12.2,-2.84 ; U9.4@-12.633,3.97 C29.2@-12.388,4.395 ; C29.2@-12.144,4.254 U9.3@-12.07,3.645 ; v1(-10,-8.2) -9.925,-8.219 -9.719,-8.271 U11.3@-9.137,-8.575 ; C33.2@-9.977,-8.42 U11.4@-9.7,-8.9 ; U8.4@-8.9,9.7 C27.2@-8.443,9.964 ; U8.3@-8.575,9.137 C27.2@-8.321,9.752 ; v1(-4.562,-12.121) C35.2@-4.55,-12.133 -4.468,-12.133 U12.4@-4.035,-12.566 ; C35.2@-4.354,-12.044 U12.3@-3.71,-12.004 ; U6.3@-2.7,12.3 -2.45,12.3 -2.1,12.65 v1(-2.1,12.8) -2.1,12.925 -2.125,12.95 U6.4@-2.7,12.95 ; U13.4@2.74,-13 2.125,-12.975 v1(2,-12.9) 2.038,-12.817 2.125,-12.625 U13.3@2.74,-12.35 ; 3.866,11.714 4.404,11.711 v1(4.6,11.8) 4.579,12.014 U5.4@4.035,12.366 ; v1(8.2,-10) 8.271,-9.819 U14.3@8.575,-9.137 ; C39.2@8.377,-10.002 U14.4@8.9,-9.7 ; U4.3@9.2,8.6 9.786,8.321 v1(10,8.3) 10.03,8.462 U4.4@9.763,8.925 ; 11.91,-3.956 11.944,-4.354 11.991,-4.56 v1(12,-4.6) ; U3.3@12.175,2.77 12.525,2.225 v1(12.7,2.1) 12.825,2.225 U3.4@12.825,2.77 ; C41.2@12.247,-4.529 U15.4@12.563,-4.125
  Bottom Layer w0.2: C21.1@1.089,-17.107 1.231,-17.356 1.884,-19.279 cw(c1.6,-19.375) 1.885,-19.28 2.185,-20.18 cw(c1.9,-20.275) 2.2,-20.275 2.2,-20.675 cw(c1.9,-20.675) 2.021,-20.949 1.85,-21.025 C20.2@1.65,-21.175 R1.2@1.65,-21.975
  Bottom Layer w0.25: C7.2@-0.275,-12.545 -0.275,-12.42 U2.4@-0.275,-11.955 ; C7.2@-0.1,-12.42 U2.3@0.375,-11.955
  Bottom Layer w0.5: -20.15,8.21 -19.951,8.133 ccw(c-19.825,8.46) -19.776,8.113 -19.068,8.212 cw(c-18.999,7.717) -19.009,8.217 -18.844,8.22 cw(c-18.833,7.72) -18.833,8.22 -18.625,8.22 C43.2@-18.625,8.225 -18.625,8.175 -16.893,3.002 ccw(c-16.3,3.2) -16.78,2.799 -13.605,-0.987 ccw(c-13.223,-0.665) -13.251,-1.164 -12.715,-1.195 ; v1(-4.562,-12.121) -4.277,-12.775 cw(c-4.85,-13.025) -4.225,-13.025 C24.1@-4.225,-14.4 ; C7.2@-0.275,-12.545 -0.225,-12.545 0.6,-13.75 C22.1@0.925,-14.4 1.25,-13.75 v1(2,-12.9)
  Bottom Layer w1: v1(-8.3,10) -8.191,10.039 cw(c-7.893,9.217) -7.375,9.923 -6.602,9.355 ; C23.1@-4.925,-16.6 -4.85,-16.2 -4.3,-14.8 C24.1@-4.225,-14.4 -4.3,-14 -4.991,-13.889 cw(c-4.85,-13.025) -5.335,-13.753 -5.713,-13.501 cw(c-5.159,-12.669) -5.935,-13.301 -9.153,-9.353 cw(c-8.475,-8.8) -9.179,-9.319 -9.979,-8.229 cw(c-9.174,-7.636) -9.989,-8.215 v1(-10,-8.2) -10.01,-8.185 cw(c-9.174,-7.636) -10.048,-8.122 -12.489,-3.777 cw(c-11.725,-3.35) -12.597,-3.426 -12.696,-2.259 cw(c-11.7,-2.171) -12.7,-2.21 v1(-12.7,-2.2) -12.7,-2.19 -12.715,-1.195 -12.775,2.888 cw(c-11.9,2.9) -12.712,3.226 -12.34,4.155 cw(c-11.411,3.784) -12.338,4.158 v1(-12.2,4.5) -10.11,5.59 ccw(c-10.515,6.366) -9.842,5.807 -8.637,7.256 cw(c-7.695,6.473) -8.551,7.35 -7.551,8.326 -7.378,8.494 ccw(c-8.077,9.21) -7.37,8.503 -7.274,8.598 ccw(c-7.893,9.217) -7.238,8.637 -6.602,9.355 ; v1(-2.1,12.8) -3.374,12.66 ccw(c-3.278,11.79) -3.934,12.37 -6.602,9.355 ; C21.1@0.8,-16.6 0.875,-16.2 0.875,-14.8 C22.1@0.925,-14.4 ; C21.1@1.089,-17.107 3.016,-18.068 ccw(c3.369,-17.356) 3.369,-18.15 4.231,-18.15 ccw(c4.231,-17.356) 4.719,-17.982 7.57,-15.761 ccw(c7.032,-15.071) 7.906,-15.114 8.137,-10.497 cw(c9.136,-10.546) 8.145,-10.414 v1(8.2,-10) 9.228,-9.223 ccw(c8.7,-8.525) 9.456,-8.966 v1(12,-4.6) 12.004,-4.593 ccw(c11.132,-4.104) 12.018,-4.568 12.6,-3.456 ccw(c11.825,-3.05) 12.7,-3.05 v1(12.7,2.1) 12.7,2.111 ccw(c11.7,2.089) 12.687,2.25 12.489,3.466 ccw(c11.625,3.325) 12.4,3.731 10.09,8.158 ccw(c9.203,7.696) 10.011,8.285 v1(10,8.3) 9.988,8.315 ccw(c9.203,7.696) 9.966,8.342 9.091,9.38 ccw(c8.421,8.817) 8.826,9.593 v1(4.6,11.8)
  Bottom Layer w1.2: C23.1@-4.925,-16.6 -2.05,-16.6 C21.1@0.8,-16.6
+5_1: C11.2 J1.1 U3.1 | length 1.8
  Top Layer w0.25: U3.1@12.825,3.63 13.375,3.575 C11.2@13.5,3.4
  Top Layer w0.6: C11.2@13.5,3.4 J1.1@14.5,3.2
+5_2: C13.2 J2.1 U4.1 | length 1.6
  Top Layer w0.25: 9.424,9.722 9.854,9.822 C13.2@10.05,9.733
  Top Layer w0.6: C13.2@10.05,9.733 J2.1@10.957,10.021
+5_3: C15.2 J3.1 U5.1 | length 1.9
  Top Layer w0.25: U5.1@3.29,12.796 3.653,13.229 C15.2@3.867,13.25
  Top Layer w0.6: C15.2@3.867,13.25 J3.1@4.479,14.157
+5_4: C17.2 J4.1 U6.1 | length 1.4
  Top Layer w0.25: U6.1@-3.56,12.95 C17.2@-3.475,13.475
  Top Layer w0.6: C17.2@-3.3,13.6 -3.2,14.3 J4.1@-3.2,14.5
+5_5: C28.2 J5.1 U8.1 | length 1.8
  Top Layer w0.25: C28.2@-9.733,10.05 -9.822,9.854 U8.1@-9.645,9.27
  Top Layer w0.6: J5.1@-10.021,10.957 C28.2@-9.733,10.05
+5_6: C30.2 J6.1 U9.1 | length 1.7
  Top Layer w0.25: C30.2@-13.45,3.767 -13.429,3.553 U9.1@-13.063,3.225
  Top Layer w0.6: J6.1@-14.157,4.479 C30.2@-13.45,3.767
+5_7: C32.2 J7.1 U10.1 | length 1.8
  Top Layer w0.25: C32.2@-13.5,-3.4 -13.375,-3.575 U10.1@-12.85,-3.7
  Top Layer w0.6: J7.1@-14.5,-3.2 C32.2@-13.5,-3.4
+5_8: C34.2 J8.1 U11.1 | length 1.7
  Top Layer w0.25: C34.2@-10.05,-9.733 -9.854,-9.822 -9.361,-9.697
  Top Layer w0.6: J8.1@-10.957,-10.021 C34.2@-10.05,-9.733
+5_9: C36.2 J9.1 U12.1 | length 1.7
  Top Layer w0.25: C36.2@-3.867,-13.45 -3.653,-13.429 U12.1@-3.29,-12.996
  Top Layer w0.6: J9.1@-4.479,-14.157 C36.2@-3.867,-13.45
+5_10: C38.2 J10.1 U13.1 | length 1.6
  Top Layer w0.25: C38.2@3.4,-13.6 3.575,-13.475 U13.1@3.6,-13
  Top Layer w0.6: J10.1@3.2,-14.5 C38.2@3.4,-13.6
+5_11: C40.2 J11.1 U14.1 | length 1.8
  Top Layer w0.25: U14.1@9.645,-9.27 9.822,-9.854 C40.2@9.733,-10.05
  Top Layer w0.6: C40.2@9.733,-10.05 J11.1@10.021,-10.957
+5_12: C42.2 J12.1 U15.1 | length 1.7
  Top Layer w0.25: U15.1@12.993,-3.38 13.379,-3.62 C42.2@13.4,-3.834
  Top Layer w0.6: C42.2@13.4,-3.834 J12.1@14.157,-4.479
+5_13: C44.2 J15.1 U16.1 | length 2.6
  Bottom Layer w0.5: -20.15,9.53 C44.2@-19.95,10.325 -19.95,11.575 J15.1@-20,12.125
CSn1: J1.3 U1.5 | length 11.9
  Top Layer w0.2: U1.5@3.425,-0.75 3.708,-0.75 cw(c3.708,-0.95) 3.729,-0.751 4.25,-0.807 5.777,-0.97 ; 5.778,-0.97 cw(c5.756,-1.169) 5.796,-0.972 v1(6.927,-1.2) ; v1(11.55,1.475) 14.067,1.446 ccw(c14.069,1.646) 14.141,1.46 J1.3@14.5,1.6
  Bottom Layer w0.2: v1(6.927,-1.2) 7.174,-0.93 cw(c7.525,-1.25) 7.298,-0.833 v1(11.55,1.475)
CSn2: J2.3 U1.9 | length 12.2
  Top Layer w0.2: U1.9@3.425,1.25 3.712,1.25 cw(c3.712,1.05) 3.718,1.25 4.66,1.222 ccw(c4.674,1.697) 4.965,1.322 5.533,1.763 ccw(c5.242,2.138) 5.688,1.974 5.765,2.186 cw(c6,2.1) 5.827,2.28 cw(c6,2.1) 5.83,2.284 v1(6.037,2.475) ; v1(8.2,7.125) 9.046,7.203 ccw(c9.017,7.502) 9.167,7.242 11.367,8.512 J2.3@11.757,8.636
  Bottom Layer w0.2: v1(6.037,2.475) v1(8.2,7.125)
CSn3: J3.3 U1.16 | length 12.3
  Top Layer w0.2: v1(0.7,7.575) 0.464,6.758 ccw(c0.92,6.627) 0.478,6.453 0.568,6.226 cw(c-0.2,5.925) 0.596,6.14 1.25,3.725 U1.16@1.25,3.425 ; v1(3.3,9.3) 4.364,10.409 ; 4.365,10.41 ccw(c4.148,10.617) 4.408,10.467 ; J3.3@5.864,13.357 5.823,12.919 5.158,11.767 cw(c4.898,11.917) 5.157,11.765 4.409,10.469 ; 4.408,10.467 ccw(c4.148,10.617) 4.409,10.469 ; 4.408,10.467 4.409,10.469
  Bottom Layer w0.2: v1(0.7,7.575) v1(3.3,9.3)
CSn4: J4.3 U1.17 | length 11.4
  Top Layer w0.2: J4.3@-1.6,14.5 -1.4,14.1 0.11,8.142 cw(c-0.35,8.025) 0.125,8.015 0.096,6.643 ccw(c0.92,6.627) 0.152,6.326 0.242,6.099 cw(c-0.2,5.925) 0.265,6.023 0.75,3.725 U1.17@0.75,3.425
CSn5: J5.3 U1.18 | length 12.7
  Top Layer w0.2: J5.3@-8.636,11.757 J5.3@-8.28,11.523 ; J5.3@-8.279,11.522 cw(c-8.39,11.356) -8.248,11.496 v1(-4.1,7.275) ; v1(-0.2,5.325) 0.243,3.741 cw(c0.05,3.687) 0.25,3.687 U1.18@0.25,3.425
  Bottom Layer w0.2: v1(-4.1,7.275) -2.438,6.314 ccw(c-2.2,6.725) -2.397,6.293 ccw(c-2.2,6.725) -2.391,6.29 v1(-0.2,5.325)
CSn6: J6.3 U1.24 | length 11.9
  Top Layer w0.2: J6.3@-13.357,5.864 -12.991,5.737 -12.989,5.737 cw(c-13.057,5.549) -12.954,5.72 v1(-9.764,3.81) ; v1(-6.407,4.933) -6.044,4.98 cw(c-5.982,4.509) -5.827,4.958 -5.782,4.943 -5.255,4.76 cw(c-5.409,4.31) -5.205,4.74 -3.478,3.929 ccw(c-3.35,4.2) -3.429,3.91 -2.75,3.725 U1.24@-2.75,3.425
  Bottom Layer w0.2: v1(-9.764,3.81) -9.175,4.037 cw(c-9.103,3.851) -9.168,4.04 cw(c-9.101,3.851) -9.163,4.042 -7.018,4.735 v1(-6.407,4.933)
CSn7: J7.3 U1.30 | length 11.6
  Top Layer w0.2: J7.3@-14.5,-1.6 -14.138,-1.419 cw(c-14.048,-1.598) -14.078,-1.4 v1(-9.1,-0.65) ; v1(-4.25,0.2) -3.638,0.241 cw(c-3.625,0.041) -3.625,0.241 -3.434,0.241 U1.30@-3.425,0.25
  Bottom Layer w0.2: v1(-9.1,-0.65) -8.503,-0.831 ccw(c-8.365,-0.377) -8.41,-0.85 -8.385,-0.852 ccw(c-8.366,-0.653) -8.378,-0.853 -8.377,-0.853 ccw(c-8.35,-0.379) -8.372,-0.853 -7.507,-0.894 -7.503,-0.894 ccw(c-7.451,0.28) -7.369,-0.892 -5.345,-0.753 ccw(c-5.378,-0.279) -5.171,-0.706 ccw(c-5.378,-0.279) -5.143,-0.691 -5.14,-0.69 -4.613,-0.387 ccw(c-4.85,0.025) -4.417,-0.17 v1(-4.25,0.2)
CSn8: J8.3 U1.32 | length 12.2
  Top Layer w0.2: J8.3@-11.757,-8.636 -11.511,-8.262 -11.385,-8.116 ccw(c-11.574,-7.953) -11.378,-8.108 -7.036,-2.61 ccw(c-7.428,-2.3) -6.979,-2.521 -6.427,-1.399 cw(c-5.788,-1.712) -5.872,-1.005 -3.725,-0.75 U1.32@-3.425,-0.75
CSn9: J9.3 U1.34 | length 12.7
  Top Layer w0.2: J9.3@-5.864,-13.357 -5.642,-13.024 -4.358,-10.8 cw(c-4.098,-10.95) -4.322,-10.751 -4.113,-10.516 ccw(c-4.3,-10.35) -4.105,-10.507 ccw(c-4.3,-10.35) -4.103,-10.503 ccw(c-4.3,-10.35) -4.067,-10.44 v1(-3.325,-8.525) ; v1(-3.872,-1.767) -3.726,-1.751 cw(c-3.704,-1.95) -3.704,-1.75 U1.34@-3.425,-1.75
  Bottom Layer w0.2: v1(-3.872,-1.767) -3.825,-3.37 cw(c-4.299,-3.386) -3.824,-3.378 -3.792,-5.347 ccw(c-3.317,-5.339) -3.787,-5.411 v1(-3.325,-8.525)
CSn10: J10.3 U1.44 | length 12.2
  Top Layer w0.2: U1.44@0.75,-3.425 0.75,-3.56 ccw(c0.95,-3.56) 0.778,-3.661 0.927,-3.916 ccw(c1.25,-3.725) 0.969,-3.974 2.019,-5.15 ccw(c3.025,-4.25) 2.036,-5.169 2.223,-5.369 2.25,-5.399 ccw(c2.396,-5.261) 2.297,-5.435 v1(2.8,-5.725) ; J10.3@1.6,-14.5 1.5,-14.1 1.5,-11.55 cw(c1.8,-11.55) 1.5,-11.534 v1(1.65,-8.875)
  Bottom Layer w0.2: v1(1.65,-8.875) 2.02,-8.081 ccw(c1.272,-7.733) 2.055,-7.991 cw(c2.245,-8.054) 2.063,-7.97 2.456,-7.125 ccw(c2.025,-6.925) 2.487,-7.035 v1(2.8,-5.725)
CSn11: J11.3 U1.45 | length 11.5
  Top Layer w0.2: U1.45@1.25,-3.425 1.25,-3.573 ccw(c1.45,-3.573) 1.28,-3.677 1.432,-3.923 ccw(c1.75,-3.725) 1.466,-3.969 2.268,-4.903 ccw(c3.025,-4.25) 2.424,-5.049 ccw(c3.025,-4.25) 2.727,-5.205 2.94,-5.271 cw(c2.8,-5.725) 3.156,-5.41 3.822,-6.163 ccw(c4.177,-5.847) 3.875,-6.213 ccw(c4.177,-5.847) 3.877,-6.216 ccw(c4.177,-5.847) 3.882,-6.219 v1(4.251,-6.511) ; v1(4.587,-8.118) 7.505,-10.561 cw(c7.2,-10.925) 7.575,-10.634 8.229,-11.476 ccw(c8.387,-11.354) 8.276,-11.52 J11.3@8.636,-11.757
  Bottom Layer w0.2: v1(4.251,-6.511) v1(4.587,-8.118)
CSn12: J12.3 U1.3 | length 10.8
  Top Layer w0.2: U1.3@3.425,-1.75 3.725,-1.75 5.866,-3.111 ccw(c6,-2.9) 5.923,-3.138 7.558,-3.667 cw(c7.45,-4) 7.582,-3.676 12.911,-5.838 J12.3@13.357,-5.864
CSn13: J15.3 U1.41 | length 27.6
  Top Layer w0.2: v1(-13.619,0.683) v1(-11.575,0.575) ; v1(-0.878,-4.059) -0.754,-3.478 ccw(c-0.95,-3.436) -0.75,-3.436 U1.41@-0.75,-3.425
  Bottom Layer w0.2: J15.3@-17.5,12.125 -17.2,11.425 -15.776,5.952 ccw(c-15.316,6.072) -15.773,5.942 -14.963,3.09 ccw(c-14.771,3.146) -14.948,3.053 -14.911,2.983 ccw(c-14.491,3.205) -14.905,2.972 v1(-13.619,0.683) ; v1(-11.575,0.575) -9.669,-1.248 ccw(c-9.1,-0.65) -9.188,-1.47 -8.49,-1.545 ccw(c-8.365,-0.377) -8.477,-1.547 -8.451,-1.549 ccw(c-8.366,-0.653) -8.406,-1.552 -7.537,-1.593 ccw(c-7.451,0.28) -7.322,-1.591 -5.296,-1.451 ccw(c-5.378,-0.279) -5.031,-1.401 -4.611,-1.271 cw(c-4.47,-1.725) -4.437,-1.251 -3.839,-1.293 cw(c-3.872,-1.767) -3.445,-1.558 -2.902,-2.669 ccw(c-2.475,-2.459) -2.735,-2.857 v1(-0.878,-4.059)
DEBUG_RX: J13.3 U1.40 | length 8
  Top Layer w0.2: J13.3@-7.2,-8.15 -6.9,-8.1 -6.717,-8.036 ccw(c-6.8,-7.8) -6.685,-8.022 -2.936,-6.071 ccw(c-3.317,-5.339) -2.661,-5.839 -2.255,-5.306 ccw(c-2.911,-4.805) -2.214,-5.247 -1.25,-3.725 U1.40@-1.25,-3.425
DEBUG_TX: J13.4 U1.39 | length 7.3
  Top Layer w0.2: J13.4@-7.2,-7.65 -6.9,-7.6 -6.717,-7.536 ccw(c-6.8,-7.3) -6.687,-7.523 -3.108,-5.765 ccw(c-3.317,-5.339) -2.94,-5.627 -2.533,-5.093 ccw(c-2.911,-4.805) -2.498,-5.04 -1.75,-3.725 U1.39@-1.75,-3.425